# Altium PCB Radar.PcbDoc (part 3 of 3)
Units mil, origin at the board's own origin, x right, y up, seen from the top; angles counter-clockwise.
Board outline 2145 x 1580 mil, 4 copper layers (Layer 1, Layer 2, Layer 3, Layer 4), stack 61.58 mil thick; 62 components, 38 nets, 226 pads, 53 vias.
Unrouted connection lines stored in the file: 17.
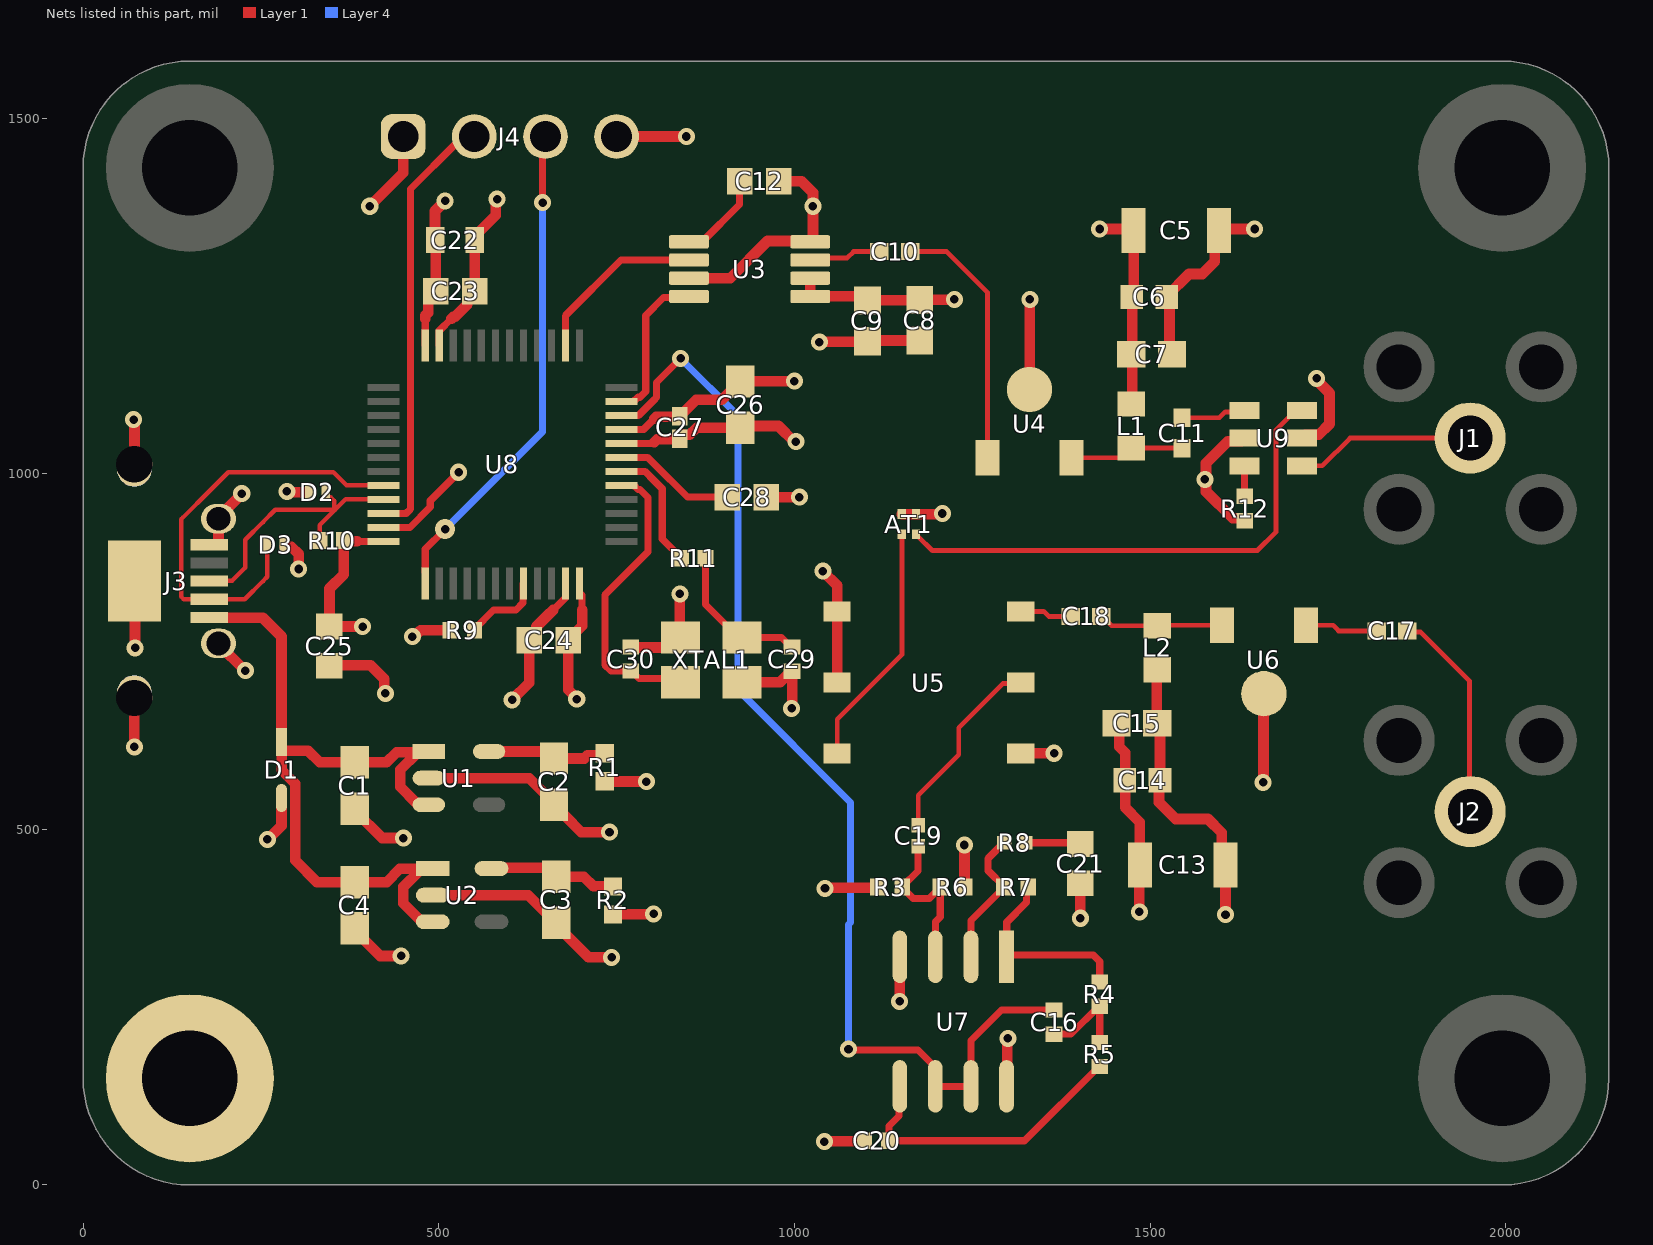
[diagram p4: the nets of this part, all layers, seen from the top]

## Part data (continued)
R3 R6: library part CRGCQ0402F33K, "Fixed Resistor, Metal Glaze/thick Film, 0.0625W, 33000ohm, 50V, 1% +/-Tol, 100ppm/Cel, Surface Mount, 0402", Manufacturer="TE Connectivity", Resistor Type="FIXED RESISTOR", Supplier Part Number=A129645CT-ND, Category="Chip SMD Resistors", ComponentLink1Description=https://datasheet.ciiva.com:443/pdfs/VipMasterIC/IC/TYEL/TYEL-S-A0009513709/TYEL-S-A0009515791-1.pdf?src-supplier=IHS+Markit, ComponentLink1URL=https://datasheet.ciiva.com:443/pdfs/VipMasterIC/IC/TYEL/TYEL-S-A0009513709/TYEL-S-A0009515791-1.pdf?src-supplier=IHS+Markit, ComponentLink2Description=https://www.te.com/commerce/DocumentDelivery/DDEController?Action=srchrtrv&amp;DocNm=1773204-3&amp;DocType=DS&amp;DocLang=English&src-supplier=Digikey, ComponentLink2URL=https://www.te.com/commerce/DocumentDelivery/DDEController?Action=srchrtrv&amp;DocNm=1773204-3&amp;DocType=DS&amp;DocLang=English&src-supplier=Digikey, ComponentLink3Description=https://datasheet.octopart.com/CRGCQ0402F33K-TE-Connectivity-datasheet-114679081.pdf?src-supplier=Master+Electronics, ComponentLink3URL=https://datasheet.octopart.com/CRGCQ0402F33K-TE-Connectivity-datasheet-114679081.pdf?src-supplier=Master+Electronics, Manufacturer Part Number=CRGCQ0402F33K, Pins=2, Pricing="1=0.1, 10=0.025, 100=0.0121, 1000=0.00663, 2500=0.00542, 5000=0.00473 (USD)", Reach SVHC Compliant=Yes, RoHS=Yes, RoHS Compliant=Yes, Stock=860508, Supplier=Digikey
R4 R5 R9: library part AC0402FR-0710KL, "Fixed Resistor, Metal Glaze/thick Film, 0.0625W, 10000ohm, 50V, 1% +/-Tol, 100ppm/Cel, Surface Mount, 0402", Case/Package=0402, Manufacturer=Yageo, Max Operating Temperature=155°C, Min Operating Temperature=-55°C, Package Height=0.32mm, Package Length=1mm, Package Shape=Rectangular, Package Width=0.5mm, Power=62.5mW, Rated Temperature=70°C, Resistor Type="FIXED RESISTOR", Supplier Part Number=YAG3436CT-ND, Temperature Coefficient (ppm/Cel)=100, Tolerance=1%, Working Voltage=50V, Additional Feature="LASER TRIMMABLE", Category="Chip SMD Resistors", ComponentLink1Description=https://datasheet.ciiva.com:443/pdfs/VipMasterIC/IC/YAGO/YAGO-S-A0003597364/YAGO-S-A0003597364-1.pdf?src-supplier=IHS+Markit, ComponentLink1URL=https://datasheet.ciiva.com:443/pdfs/VipMasterIC/IC/YAGO/YAGO-S-A0003597364/YAGO-S-A0003597364-1.pdf?src-supplier=IHS+Markit, ComponentLink2Description=https://datasheet.ciiva.com/12656/pyu-ac-51-rohs-l-2-12656634.pdf?src-supplier=Mouser, ComponentLink2URL=https://datasheet.ciiva.com/12656/pyu-ac-51-rohs-l-2-12656634.pdf?src-supplier=Mouser, Construction=Chip, JESD-609 Code=e3, Manufacturer Part Number=AC0402FR-0710KL, Mounting Technology="Surface Mount", Packaging="Tape and Reel", Pins=2, Pricing="1=0.1, 10=0.009, 100=0.0082, 1000=0.00612, 2500=0.0051, 5000=0.00407 (USD)", Reach SVHC Compliant=Yes, Reference Standard=AEC-Q200, RoHS=Yes, RoHS Compliant=Yes, Stock=889565, Supplier=Digikey, Technology="METAL GLAZE/THICK FILM", Terminal Finish=Nickel, Termination=Wraparound
R7: library part RC0402FR-07300KL, "Fixed Resistor, Metal Glaze/thick Film, 0.0625W, 300000ohm, 50V, 1% +/-Tol, 100ppm/Cel, Surface Mount, 0402", Case/Package=0402, Manufacturer=Yageo, Max Operating Temperature=155°C, Min Operating Temperature=-55°C, Package Height=0.35mm, Package Length=1mm, Package Shape=Rectangular, Package Width=0.5mm, Power=62.5mW, Rated Temperature=70°C, Resistor Type="FIXED RESISTOR", Supplier Part Number=311-300KLRCT-ND, Temperature Coefficient (ppm/Cel)=100, Tolerance=1%, Working Voltage=50V, Additional Feature="LASER TRIMMABLE", Category="Chip SMD Resistors", ComponentLink1Description=https://datasheet.ciiva.com:443/pdfs/VipMasterIC/IC/YAGO/YAGO-S-A0008145938/YAGO-S-A0008145938-1.pdf?src-supplier=IHS+Markit, ComponentLink1URL=https://datasheet.ciiva.com:443/pdfs/VipMasterIC/IC/YAGO/YAGO-S-A0008145938/YAGO-S-A0008145938-1.pdf?src-supplier=IHS+Markit, ComponentLink2Description=https://datasheet.ciiva.com/16771/pyu-rc0402-51-rohs-l-6-r-16771583.pdf?src-supplier=Future+Electronics, ComponentLink2URL=https://datasheet.ciiva.com/16771/pyu-rc0402-51-rohs-l-6-r-16771583.pdf?src-supplier=Future+Electronics, Construction=Chip, JESD-609 Code=e3, Manufacturer Part Number=RC0402FR-07300KL, Mounting Technology="Surface Mount", Packaging="Tape and Reel", Pins=2, Pricing="1=0.1, 10=0.007, 100=0.0061, 1000=0.00408, 2500=0.00357 (USD)", Reach SVHC Compliant=Yes, RoHS=Yes, RoHS Compliant=Yes, Stock=802480, Supplier=Digikey, Technology="METAL GLAZE/THICK FILM", Terminal Finish=Nickel, Termination=Wraparound
R8: library part RC0402FR-071KL, "Fixed Resistor, Metal Glaze/thick Film, 0.0625W, 1000ohm, 50V, 1% +/-Tol, 100ppm/Cel, Surface Mount, 0402", Case/Package=0402, Manufacturer=Yageo, Max Operating Temperature=155°C, Min Operating Temperature=-55°C, Package Height=0.35mm, Package Length=1mm, Package Shape=Rectangular, Package Width=0.5mm, Power=62.5mW, Rated Temperature=70°C, Resistor Type="FIXED RESISTOR", Supplier Part Number=311-1.00KLRTR-ND, Temperature Coefficient (ppm/Cel)=100, Tolerance=1%, Working Voltage=50V, Additional Feature="LASER TRIMMABLE", Category="Chip SMD Resistors", ComponentLink1Description=https://datasheet.ciiva.com:443/pdfs/VipMasterIC/IC/YAGO/YAGO-S-A0008145938/YAGO-S-A0008145938-1.pdf?src-supplier=IHS+Markit, ComponentLink1URL=https://datasheet.ciiva.com:443/pdfs/VipMasterIC/IC/YAGO/YAGO-S-A0008145938/YAGO-S-A0008145938-1.pdf?src-supplier=IHS+Markit, ComponentLink2Description=https://datasheet.ciiva.com/11819/0900766b80c66297-11819477.pdf?src-supplier=Rs, ComponentLink2URL=https://datasheet.ciiva.com/11819/0900766b80c66297-11819477.pdf?src-supplier=Rs, ComponentLink3Description=https://datasheet.ciiva.com/7849/1018594-7849869.pdf?src-supplier=Element14, ComponentLink3URL=https://datasheet.ciiva.com/7849/1018594-7849869.pdf?src-supplier=Element14, ComponentLink4Description=https://datasheet.ciiva.com/7849/1018594-7849871.pdf?src-supplier=Element14, ComponentLink4URL=https://datasheet.ciiva.com/7849/1018594-7849871.pdf?src-supplier=Element14, ComponentLink5Description=https://datasheet.ciiva.com/7983/1018594-7983502.pdf?src-supplier=Element14, ComponentLink5URL=https://datasheet.ciiva.com/7983/1018594-7983502.pdf?src-supplier=Element14, ComponentLink6Description=https://datasheet.ciiva.com/22747/1018594-22747513.pdf?src-supplier=Element14, ComponentLink6URL=https://datasheet.ciiva.com/22747/1018594-22747513.pdf?src-supplier=Element14, ComponentLink7Description=https://datasheet.ciiva.com/17063/pyu-rc0402-51-rohs-l-6-r-17063193.pdf?src-supplier=Future+Electronics, ComponentLink7URL=https://datasheet.ciiva.com/17063/pyu-rc0402-51-rohs-l-6-r-17063193.pdf?src-supplier=Future+Electronics, ComponentLink8Description=https://datasheet.ciiva.com/12666/pyu-rc0402-51-rohs-l-6-r-12666741.pdf?src-supplier=Mouser, ComponentLink8URL=https://datasheet.ciiva.com/12666/pyu-rc0402-51-rohs-l-6-r-12666741.pdf?src-supplier=Mouser, Construction=Chip, JESD-609 Code=e3, Manufacturer Part Number=RC0402FR-071KL, Mounting Technology="Surface Mount", Packaging="Tape and Reel", Pins=2, Pricing="10000=0.00204, 20000=0.002, 30000=0.00181, 50000=0.0017, 70000=0.00161 (USD)", Reach SVHC Compliant=Yes, RoHS=Yes, RoHS Compliant=Yes, Stock=1112186, Supplier=Digikey, Technology="METAL GLAZE/THICK FILM", Terminal Finish=Nickel, Termination=Wraparound
R10: library part RC0402FR-071K5L, "Fixed Resistor, Metal Glaze/thick Film, 0.0625W, 1500ohm, 50V, 1% +/-Tol, 100ppm/Cel, Surface Mount, 0402", Case/Package=0402, Manufacturer=Yageo, Max Operating Temperature=155°C, Min Operating Temperature=-55°C, Package Height=0.35mm, Package Length=1mm, Package Shape=Rectangular, Package Width=0.5mm, Power=62.5mW, Rated Temperature=70°C, Resistor Type="FIXED RESISTOR", Supplier Part Number=311-1.50KLRCT-ND, Temperature Coefficient (ppm/Cel)=100, Tolerance=1%, Working Voltage=50V, Additional Feature="LASER TRIMMABLE", Category="Chip SMD Resistors", ComponentLink1Description=https://datasheet.ciiva.com:443/pdfs/VipMasterIC/IC/YAGO/YAGO-S-A0008145938/YAGO-S-A0008145938-1.pdf?src-supplier=IHS+Markit, ComponentLink1URL=https://datasheet.ciiva.com:443/pdfs/VipMasterIC/IC/YAGO/YAGO-S-A0008145938/YAGO-S-A0008145938-1.pdf?src-supplier=IHS+Markit, ComponentLink2Description=https://datasheet.ciiva.com/11808/0900766b80c66297-11808238.pdf?src-supplier=Rs, ComponentLink2URL=https://datasheet.ciiva.com/11808/0900766b80c66297-11808238.pdf?src-supplier=Rs, ComponentLink3Description=https://datasheet.ciiva.com/7849/1018594-7849863.pdf?src-supplier=Element14, ComponentLink3URL=https://datasheet.ciiva.com/7849/1018594-7849863.pdf?src-supplier=Element14, ComponentLink4Description=https://datasheet.ciiva.com/7849/1018594-7849864.pdf?src-supplier=Element14, ComponentLink4URL=https://datasheet.ciiva.com/7849/1018594-7849864.pdf?src-supplier=Element14, ComponentLink5Description=https://datasheet.ciiva.com/2453/pyu-r-int-thick-7-2453439.pdf?src-supplier=Digikey, ComponentLink5URL=https://datasheet.ciiva.com/2453/pyu-r-int-thick-7-2453439.pdf?src-supplier=Digikey, ComponentLink6Description=https://datasheet.ciiva.com/2453/pyu-r-int-thick-7-2453440.pdf?src-supplier=Digikey, ComponentLink6URL=https://datasheet.ciiva.com/2453/pyu-r-int-thick-7-2453440.pdf?src-supplier=Digikey, ComponentLink7Description=https://datasheet.ciiva.com/2453/pyu-r-int-thick-7-2453441.pdf?src-supplier=Digikey, ComponentLink7URL=https://datasheet.ciiva.com/2453/pyu-r-int-thick-7-2453441.pdf?src-supplier=Digikey, ComponentLink8Description=https://datasheet.ciiva.com/12558/pyu-rc0402-51-rohs-l-6-r-8721-12558542.pdf?src-supplier=Mouser, ComponentLink8URL=https://datasheet.ciiva.com/12558/pyu-rc0402-51-rohs-l-6-r-8721-12558542.pdf?src-supplier=Mouser, ComponentLink9Description=https://datasheet.ciiva.com/46394/1018594-46394950.pdf?src-supplier=Element14, ComponentLink9URL=https://datasheet.ciiva.com/46394/1018594-46394950.pdf?src-supplier=Element14, ComponentLink10Description=https://datasheet.ciiva.com/15189/getdatasheetpartid-323992-15189370.pdf?src-supplier=Verical, ComponentLink10URL=https://datasheet.ciiva.com/15189/getdatasheetpartid-323992-15189370.pdf?src-supplier=Verical, Construction=Chip, JESD-609 Code=e3, Manufacturer Part Number=RC0402FR-071K5L, Mounting Technology="Surface Mount", Packaging="Tape and Reel", Pins=2, Pricing="1=0.1, 10=0.013, 100=0.0061, 1000=0.0051, 2500=0.00306, 10000=0.00306, 20000=0.00204, 30000=0.0017, 50000=0.00161 (USD)", Reach SVHC Compliant=Yes, RoHS=Yes, RoHS Compliant=Yes, Stock=344101, Supplier=Digikey, Technology="METAL GLAZE/THICK FILM", Terminal Finish=Nickel, Termination=Wraparound
R11: library part RC0402JR-07390RL, "Fixed Resistor, Metal Glaze/thick Film, 0.0625W, 390ohm, 50V, 5% +/-Tol, 100ppm/Cel, Surface Mount, 0402", Case/Package=0402, Manufacturer=Yageo, Max Operating Temperature=155°C, Min Operating Temperature=-55°C, Package Height=0.35mm, Package Length=1mm, Package Shape=Rectangular, Package Width=0.5mm, Power=62.5mW, Rated Temperature=70°C, Resistor Type="FIXED RESISTOR", Supplier Part Number=311-390JRCT-ND, Temperature Coefficient (ppm/Cel)=100, Tolerance=5%, Working Voltage=50V, Additional Feature="LASER TRIMMABLE", Category="Chip SMD Resistors", ComponentLink1Description=https://datasheet.ciiva.com:443/pdfs/VipMasterIC/IC/YAGO/YAGO-S-A0008145938/YAGO-S-A0008145938-1.pdf?src-supplier=IHS+Markit, ComponentLink1URL=https://datasheet.ciiva.com:443/pdfs/VipMasterIC/IC/YAGO/YAGO-S-A0008145938/YAGO-S-A0008145938-1.pdf?src-supplier=IHS+Markit, ComponentLink2Description=https://datasheet.ciiva.com/7983/1018594-7983580.pdf?src-supplier=Element14, ComponentLink2URL=https://datasheet.ciiva.com/7983/1018594-7983580.pdf?src-supplier=Element14, ComponentLink3Description=https://datasheet.ciiva.com/7850/1018594-7850204.pdf?src-supplier=Element14, ComponentLink3URL=https://datasheet.ciiva.com/7850/1018594-7850204.pdf?src-supplier=Element14, ComponentLink4Description=https://datasheet.ciiva.com/7850/1018594-7850205.pdf?src-supplier=Element14, ComponentLink4URL=https://datasheet.ciiva.com/7850/1018594-7850205.pdf?src-supplier=Element14, ComponentLink5Description=https://datasheet.ciiva.com/12656/pyu-rc0402-51-rohs-l-6-r-12656651.pdf?src-supplier=Mouser, ComponentLink5URL=https://datasheet.ciiva.com/12656/pyu-rc0402-51-rohs-l-6-r-12656651.pdf?src-supplier=Mouser, ComponentLink6Description=https://datasheet.ciiva.com/2452/pyu-r-int-thick-7-2452668.pdf?src-supplier=Digikey, ComponentLink6URL=https://datasheet.ciiva.com/2452/pyu-r-int-thick-7-2452668.pdf?src-supplier=Digikey, ComponentLink7Description=https://datasheet.ciiva.com/2452/pyu-r-int-thick-7-2452669.pdf?src-supplier=Digikey, ComponentLink7URL=https://datasheet.ciiva.com/2452/pyu-r-int-thick-7-2452669.pdf?src-supplier=Digikey, ComponentLink8Description=https://datasheet.ciiva.com/2452/pyu-r-int-thick-7-2452670.pdf?src-supplier=Digikey, ComponentLink8URL=https://datasheet.ciiva.com/2452/pyu-r-int-thick-7-2452670.pdf?src-supplier=Digikey, Construction=Chip, JESD-609 Code=e3, Manufacturer Part Number=RC0402JR-07390RL, Mounting Technology="Surface Mount", Packaging="Tape and Reel", Pins=2, Pricing="1=0.1, 10=0.007, 50=0.0066, 100=0.0061, 500=0.0051, 1000=0.00408, 5000=0.00284 (USD)", Reach SVHC Compliant=Yes, RoHS=Yes, RoHS Compliant=Yes, Stock=313047, Supplier=Digikey, Technology="METAL GLAZE/THICK FILM", Terminal Finish=Nickel, Termination=Wraparound
R12: library part RT0402BRE0750RL, "Fixed Resistor, Thin Film, 0.0625W, 50ohm, 50V, 0.1% +/-Tol, 50ppm/Cel, Surface Mount, 0402", Case/Package=0402, Manufacturer=Yageo, Max Operating Temperature=155°C, Min Operating Temperature=-55°C, Package Shape=Rectangular, Power=62.5mW, Rated Temperature=70°C, Resistor Type="FIXED RESISTOR", Supplier Part Number=13-RT0402BRE0750RLCT-ND, Tolerance=0.1%, Working Voltage=50V, Additional Feature="LASER TRIMMABLE", Category="Chip SMD Resistors", ComponentLink1Description=https://datasheet.ciiva.com:443/pdfs/VipMasterIC/IC/YAGO/YAGO-S-A0003507815/YAGO-S-A0003507815-1.pdf?src-supplier=IHS+Markit, ComponentLink1URL=https://datasheet.ciiva.com:443/pdfs/VipMasterIC/IC/YAGO/YAGO-S-A0003507815/YAGO-S-A0003507815-1.pdf?src-supplier=IHS+Markit, ComponentLink2Description=http://www.yageo.com/documents/recent/PYu-RT_1-to-0.01_RoHS_L_9.pdf?src-supplier=Digikey, ComponentLink2URL=http://www.yageo.com/documents/recent/PYu-RT_1-to-0.01_RoHS_L_9.pdf?src-supplier=Digikey, ComponentLink3Description=https://datasheet.octopart.com/RT0402BRE0750RL-Yageo-datasheet-166250672.pdf?src-supplier=Future+Electronics, ComponentLink3URL=https://datasheet.octopart.com/RT0402BRE0750RL-Yageo-datasheet-166250672.pdf?src-supplier=Future+Electronics, Manufacturer Part Number=RT0402BRE0750RL, Mounting Technology="Surface Mount", Packaging="Tape and Reel", Pins=2, Pricing="1=0.18, 10=0.133, 50=0.1072, 100=0.0959, 500=0.0765, 1000=0.06834, 5000=0.05406 (USD)", Reach SVHC Compliant=Yes, RoHS=Yes, RoHS Compliant=Yes, Stock=2520, Supplier=Digikey, Technology="THIN FILM", Temperature Coefficient (ppm/Cel)=50, Termination=Wraparound
U1: "Fixed Positive LDO Regulator, 3.3V, 0.31V Dropout, CMOS, PDSO5", Case/Package=LSSOP, Dropout Voltage1-Max=310mV, Manufacturer=Microchip, Max Supply Voltage=6V, Min Input Voltage=4.3V, Operating Temperature, TJ-Max=125°C, Operating Temperature, TJ-Min=-40°C, Output Current1-Max=150mA, Output Voltage1-Max=3.399V, Output Voltage1-Min=3.201V, Output Voltage1-Nom=3.3V, Package Body Material=Plastic, Package Shape=Rectangular, Package Style="SMALL OUTLINE, LOW PROFILE, SHRINK PITCHMeter", Supplier Part Number=MIC5317-3.3YM5-CT-ND, Category="Voltage Regulators - Linear", Channels=1, ComponentLink1Description=https://datasheet.ciiva.com:443/pdfs/VipMasterIC/IC/MCRL/MCRLS06213/MCRLS06213-1.pdf?src-supplier=IHS+Markit, ComponentLink1URL=https://datasheet.ciiva.com:443/pdfs/VipMasterIC/IC/MCRL/MCRLS06213/MCRLS06213-1.pdf?src-supplier=IHS+Markit, ComponentLink2Description=http://components.arrow.com/part/dataview/62845788S774067N1374?src-supplier=Arrow+Electronics, ComponentLink2URL=http://components.arrow.com/part/dataview/62845788S774067N1374?src-supplier=Arrow+Electronics, ComponentLink3Description=http://www.microchip.com/mymicrochip/filehandler.aspx?ddocname=en579427&src-supplier=Digikey, ComponentLink3URL=http://www.microchip.com/mymicrochip/filehandler.aspx?ddocname=en579427&src-supplier=Digikey, ComponentLink4Description=https://datasheet.octopart.com/MIC5317-3.3YM5-TR-Microchip-datasheet-26354330.pdf?src-supplier=Element14, ComponentLink4URL=https://datasheet.octopart.com/MIC5317-3.3YM5-TR-Microchip-datasheet-26354330.pdf?src-supplier=Element14, Height - Seated (Max)=1.45mm, JESD-30 Code=R-PDSO-G5, Length=2.9mm, Manufacturer Part Number=MIC5317-3.3YM5-TR, Pins=5, Pricing="1=0.22, 25=0.18, 100=0.16, 3000=0.16 (USD)", Reach SVHC Compliant=Yes, Regulator Type="FIXED POSITIVE SINGLE OUTPUT LDO REGULATOR", RoHS=No, Stock=26650, Supplier=Digikey, Surface Mount=Yes, Technology=CMOS, Terminal Form="Gull Wing", Terminal Pitch=0.95mm, Terminal Position=DUAL, Width=1.6mm
U2: "Fixed Positive LDO Regulator, 5V, 0.25V Dropout, PDSO5", Manufacturer="Texas Instruments", Supplier Part Number=296-TPS7A2450DBVRCT-ND, Category="Voltage Regulators - Linear", ComponentLink1Description=http://www.ti.com/general/docs/suppproductinfo.tsp?distId=10&amp;gotoUrl=http%3A%2F%2Fwww.ti.com%2Flit%2Fgpn%2Ftps7a24&src-supplier=Digikey, ComponentLink1URL=http://www.ti.com/general/docs/suppproductinfo.tsp?distId=10&amp;gotoUrl=http%3A%2F%2Fwww.ti.com%2Flit%2Fgpn%2Ftps7a24&src-supplier=Digikey, Manufacturer Part Number=TPS7A2450DBVR, Pricing="1=0.52, 10=0.362, 25=0.324, 100=0.2817, 250=0.26148, 500=0.24932, 1000=0.23931 (USD)", RoHS=Yes, Stock=4495, Supplier=Digikey
U3: "Voltage Controlled Oscillator, 2370MHz Min, 2470MHz Max", Control Voltage-Max=2.4V, Control Voltage-Min=400mV, Manufacturer=Maxim, Manufacturer Series=MAX2750AUA, Max Operating Temperature=125°C, Max Supply Current=21mA, Max Supply Voltage=5.5V, Min Operating Temperature=-40°C, Min Supply Voltage=2.7V, Offset Frequency=4MHz, Operating Frequency-Max=2.47GHz, Operating Frequency-Min=2.37GHz, Output Power (dBm)=-3dBm, Package Body Material=Plastic, Package Equivalence Code=TSSOP8,.19, Power Supplies=3/5V, Supplier Part Number=MAX2750AUA+-ND, Category=Oscillators, ComponentLink1Description=https://datasheet.ciiva.com:443/pdfs/VipMasterIC/IC/MAXM/MAXM-S-A0000999237/MAXM-S-A0000999237-1.pdf?src-supplier=IHS+Markit, ComponentLink1URL=https://datasheet.ciiva.com:443/pdfs/VipMasterIC/IC/MAXM/MAXM-S-A0000999237/MAXM-S-A0000999237-1.pdf?src-supplier=IHS+Markit, ComponentLink2Description=https://datasheet.ciiva.com/2796/max2750aua-2796961.pdf?src-supplier=Digikey, ComponentLink2URL=https://datasheet.ciiva.com/2796/max2750aua-2796961.pdf?src-supplier=Digikey, ComponentLink3Description=https://datasheet.ciiva.com/12071/max2750aua-73109-12071954.pdf?src-supplier=Mouser, ComponentLink3URL=https://datasheet.ciiva.com/12071/max2750aua-73109-12071954.pdf?src-supplier=Mouser, JESD-609 Code=e3, Manufacturer Part Number=MAX2750AUA+, Mounting Technology="Surface Mount", Oscillator Type="VOLTAGE CONTROLLED OSCILLATOR", Phase Noise=-125dBc/Hz, Pins=8, Pricing="1=8.28, 10=7.191, 50=6.5428, 100=6.29, 250=5.97796, 500=5.7577, 1000=5.5503 (USD)", Qualification Status="Not Qualified", Reach SVHC Compliant=Yes, RoHS=Yes, RoHS Compliant=Yes, Stock=638, Supplier=Digikey, Terminal Finish=Tin
U4 U6: "Wide Band Medium Power Amplifier, 30MHz Min, 6000MHz Max, 1 Func, BIPolar", Manufacturer="Analog Devices", Supplier Part Number=505-ADL5545ARKZ-R7CT-ND, Category="RF Amplifiers", ComponentLink1Description=https://datasheet.ciiva.com:443/pdfs/VipMasterIC/IC/ANDI/ANDIS19839/ANDIS19839-1.pdf?src-supplier=IHS+Markit, ComponentLink1URL=https://datasheet.ciiva.com:443/pdfs/VipMasterIC/IC/ANDI/ANDIS19839/ANDIS19839-1.pdf?src-supplier=IHS+Markit, ComponentLink2Description=https://datasheet.ciiva.com/18576/adl5545-18576150.pdf?src-supplier=Digikey, ComponentLink2URL=https://datasheet.ciiva.com/18576/adl5545-18576150.pdf?src-supplier=Digikey, ComponentLink3Description=https://datasheet.ciiva.com/22628/1800592-22628003.pdf?src-supplier=Element14, ComponentLink3URL=https://datasheet.ciiva.com/22628/1800592-22628003.pdf?src-supplier=Element14, ComponentLink4Description=https://datasheet.ciiva.com/18576/adl5545-18576151.pdf?src-supplier=Digikey, ComponentLink4URL=https://datasheet.ciiva.com/18576/adl5545-18576151.pdf?src-supplier=Digikey, ComponentLink5Description=https://datasheet.ciiva.com/18576/adl5545-18576152.pdf?src-supplier=Digikey, ComponentLink5URL=https://datasheet.ciiva.com/18576/adl5545-18576152.pdf?src-supplier=Digikey, Manufacturer Part Number=ADL5545ARKZ-R7, Pricing="1=4.14, 10=3.577, 25=3.3816, 100=3.1132, 250=2.95236, 500=2.83876 (USD)", Reach SVHC Compliant=Yes, RF/Microwave Device Type="WIDE BAND MEDIUM POWER", RoHS=Yes, RoHS Compliant=Yes, Stock=532, Supplier=Digikey
U5: library part ADE-30+
U7: "Operational Amplifier, 2 Func, 550uV Offset-Max, PDSO8", Average Bias Current-Max (IIB)=12uA, Case/Package=SOP, Input Offset Voltage-Max=550uV, Manufacturer="Analog Devices / Linear Technology", Max Operating Temperature=85°C, Min Operating Temperature=-40°C, Neg Supply Voltage Limit-Max=-6.3V, Neg Supply Voltage-Nom (Vsup)=-5V, Nominal Supply Voltage=5V, Package Body Material=Plastic, Package Shape=Rectangular, Package Style="SMALL OUTLINEMeter", Peak Reflow Temperature (Cel)=260°C, Supplier Part Number=505-LT6231IS8#PBF-ND, Supply Voltage Limit-Max=6.3V, Temperature Grade=INDUSTRIAL, Time @ Peak Reflow Temperature-Max (s)=30s, Amplifier Type="OPERATIONAL AMPLIFIER", Category="Amplifiers - Op Amps, Buffer, Instrumentation", Channels=2, Common-mode Reject Ratio-Nom=95dB, ComponentLink1Description=https://datasheet.ciiva.com:443/pdfs/VipMasterIC/IC/LITC/LITCS10845/LITCS10845-1.pdf?src-supplier=IHS+Markit, ComponentLink1URL=https://datasheet.ciiva.com:443/pdfs/VipMasterIC/IC/LITC/LITCS10845/LITCS10845-1.pdf?src-supplier=IHS+Markit, ComponentLink2Description=https://datasheet.ciiva.com/1802/2098-1802952.pdf?src-supplier=Digikey, ComponentLink2URL=https://datasheet.ciiva.com/1802/2098-1802952.pdf?src-supplier=Digikey, ComponentLink3Description=https://datasheet.ciiva.com/22637/1599634-22637797.pdf?src-supplier=Element14, ComponentLink3URL=https://datasheet.ciiva.com/22637/1599634-22637797.pdf?src-supplier=Element14, ComponentLink4Description=https://datasheet.ciiva.com/48705/001255199-da-01-en-ic-op-amp-dual-lt6231is8-pbf-soic-8-ltc-48705643.pdf?src-supplier=Conrad, ComponentLink4URL=https://datasheet.ciiva.com/48705/001255199-da-01-en-ic-op-amp-dual-lt6231is8-pbf-soic-8-ltc-48705643.pdf?src-supplier=Conrad, Height - Seated (Max)=1.752mm, JESD-30 Code=R-PDSO-G8, JESD-609 Code=e3, Length=4.9mm, Manufacturer Part Number=LT6231IS8#PBF, Moisture Sensitivity Level=1, Pins=8, Pricing="1=7.31, 10=4.917, 25=4.2932, 100=3.7375 (USD)", Qualification Status="Not Qualified", Reach SVHC Compliant=Yes, RoHS=Yes, RoHS Compliant=Yes, Slew Rate=260V/µs, Stock=9166, Supplier=Digikey, Surface Mount=Yes, Terminal Finish=Tin, Terminal Form="Gull Wing", Terminal Pitch=1.27mm, Terminal Position=DUAL, Unity Gain BW-Nom=215MHz, Width=3.9mm
U8: "RISC Microcontroller, 32-Bit, FLASH, CORTEX-M4F CPU, 72MHz, CMOS, PQFP48", Case/Package=LFQFP, Clock Frequency=32MHz, Manufacturer=STMicroelectronics, Max Operating Temperature=85°C, Max Supply Voltage=3.6V, Min Operating Temperature=-40°C, Min Supply Voltage=2V, Nominal Supply Voltage=3.3V, Package Body Material=Plastic, Package Equivalence Code=QFP48,.35SQ,20, Package Shape=Square, Power Supplies=2.5/3.3, Supplier Part Number=497-17421-ND, Temperature Grade=INDUSTRIAL, Category=Microcontrollers, ComponentLink1Description=https://datasheet.ciiva.com:443/pdfs/VipMasterIC/IC/SGST/SGST-S-A0001312473/SGST-S-A0001312473-1.pdf?src-supplier=IHS+Markit, ComponentLink1URL=https://datasheet.ciiva.com:443/pdfs/VipMasterIC/IC/SGST/SGST-S-A0001312473/SGST-S-A0001312473-1.pdf?src-supplier=IHS+Markit, ComponentLink2Description=https://datasheet.ciiva.com/22692/1831499-22692000.pdf?src-supplier=Element14, ComponentLink2URL=https://datasheet.ciiva.com/22692/1831499-22692000.pdf?src-supplier=Element14, ComponentLink3Description=https://datasheet.ciiva.com/29719/dm00058181-29719710.pdf?src-supplier=Digikey, ComponentLink3URL=https://datasheet.ciiva.com/29719/dm00058181-29719710.pdf?src-supplier=Digikey, ComponentLink4Description=https://datasheet.ciiva.com/24182/dm00058181-24182821.pdf?src-supplier=Future+Electronics, ComponentLink4URL=https://datasheet.ciiva.com/24182/dm00058181-24182821.pdf?src-supplier=Future+Electronics, Height - Seated (Max)=1.6mm, JESD-30 Code=S-PQFP-G48, JESD-609 Code=e3, Length=7mm, Manufacturer Part Number=STM32F303CBT6, Moisture Sensitivity Level=3, Number of I/O Lines=37, Pins=48, Pricing="1=5.55, 10=4.266, 25=3.946, 100=3.5937, 250=3.44032 (USD)", Qualification Status="Not Qualified", Reach SVHC Compliant=Yes, RoHS=Yes, RoHS Compliant=Yes, Stock=6091, Supplier=Digikey, Surface Mount=Yes, Technology=CMOS, Terminal Finish=Tin, Terminal Form="Gull Wing", Terminal Pitch=0.5mm, Terminal Position=QUAD, Width=7mm
U9: "Bi-Directional Coupler, 824MHz Min, 2525MHz Max, 1.5dB Insertion Loss-Max", Manufacturer=Mini-Circuits, Max Operating Temperature=100°C, Min Operating Temperature=-55°C, Operating Frequency-Max=2.525GHz, Operating Frequency-Min=824MHz, Supplier Part Number=3157-BDCN-10-25+CT-ND, Characteristic Impedance=50R, ComponentLink1Description=https://datasheet.ciiva.com:443/pdfs/VipMasterIC/IC/MINI/MINI-S-A0002822080/MINI-S-A0002822080-1.pdf?src-supplier=IHS+Markit, ComponentLink1URL=https://datasheet.ciiva.com:443/pdfs/VipMasterIC/IC/MINI/MINI-S-A0002822080/MINI-S-A0002822080-1.pdf?src-supplier=IHS+Markit, ComponentLink2Description=http://datasheet.octopart.com/BDCN-10-25%2B-Mini-Circuits-datasheet-8617095.pdf?src-supplier=Digikey, ComponentLink2URL=http://datasheet.octopart.com/BDCN-10-25%2B-Mini-Circuits-datasheet-8617095.pdf?src-supplier=Digikey, ComponentLink3Description=http://datasheet.octopart.com/BDCN-10-25%2B-Mini-Circuits-datasheet-8617095.pdf?src-supplier=Mouser, ComponentLink3URL=http://datasheet.octopart.com/BDCN-10-25%2B-Mini-Circuits-datasheet-8617095.pdf?src-supplier=Mouser, Construction=COMPONENT, Insertion Loss-Max=1.5dB, JESD-609 Code=e3, Manufacturer Part Number=BDCN-10-25+, Pricing="1=5.44, 20=4.932, 50=4.476, 100=4.176, 200=3.84, 500=3.55202, 1000=3.5037 (USD)", Reach SVHC Compliant=Yes, RF/Microwave Device Type="BI-DIRECTIONAL COUPLER", RoHS=Yes, RoHS Compliant=Yes, Stock=5826, Supplier=Digikey, Terminal Finish=Nickel, VSWR-Max=1.2
XTAL1: library part "TSX-3225 16.0000MF18X-AC0", "Parallel - Fundamental Quartz Crystal, 16MHz Nom", Frequency Stability=0.0018%, Frequency Tolerance=10ppm, Load Capacitance=9pF, Manufacturer=Epson, Max Operating Temperature=85°C, Min Operating Temperature=-40°C, Operating Frequency-Nom=160, Supplier Part Number=SER4070CT-ND, Additional Feature="TAPE AND REEL", Aging="1 PPM/FIRST YEAR", Category=Crystals, ComponentLink1Description=https://datasheet.ciiva.com:443/pdfs/VipMasterIC/IC/SEIK/SEIKS02827/SEIKS02827-1.pdf?src-supplier=IHS+Markit, ComponentLink1URL=https://datasheet.ciiva.com:443/pdfs/VipMasterIC/IC/SEIK/SEIKS02827/SEIKS02827-1.pdf?src-supplier=IHS+Markit, ComponentLink2Description=https://www.eea.epson.com/wp-content/uploads/2016/11/November-2016-PCS-MASTER-BOOK.pdf?src-supplier=Verical, ComponentLink2URL=https://www.eea.epson.com/wp-content/uploads/2016/11/November-2016-PCS-MASTER-BOOK.pdf?src-supplier=Verical, ComponentLink3Description=https://www5.epsondevice.com/en/information/support/pdf/june_2018_psc_masterbook.pdf?src-supplier=Digikey, ComponentLink3URL=https://www5.epsondevice.com/en/information/support/pdf/june_2018_psc_masterbook.pdf?src-supplier=Digikey, ComponentLink4Description=https://datasheet.octopart.com/TSX-3225-16.0000MF18X-AC0-Epson-datasheet-61114919.pdf?src-supplier=Future+Electronics, ComponentLink4URL=https://datasheet.octopart.com/TSX-3225-16.0000MF18X-AC0-Epson-datasheet-61114919.pdf?src-supplier=Future+Electronics, ComponentLink5Description=https://www.eea.epson.com/wp-content/uploads/2016/11/November-2016-PCS-MASTER-BOOK.pdf?src-supplier=Mouser, ComponentLink5URL=https://www.eea.epson.com/wp-content/uploads/2016/11/November-2016-PCS-MASTER-BOOK.pdf?src-supplier=Mouser, ComponentLink6Description=https://datasheet.octopart.com/TSX-3225-16.0000MF18X-AC0-Epson-datasheet-140567378.pdf?src-supplier=Arrow.cn, ComponentLink6URL=https://datasheet.octopart.com/TSX-3225-16.0000MF18X-AC0-Epson-datasheet-140567378.pdf?src-supplier=Arrow.cn, Crystal/Resonator Type="PARALLEL - FUNDAMENTAL", Drive Level=1uW, ESR=60R, JESD-609 Code=e4, Manufacturer Part Number="TSX-3225 16.0000MF18X-AC0", Mounting Technology="Surface Mount", Pricing="1=0.39, 10=0.342, 50=0.3104, 100=0.2976, 500=0.26974 (USD)", Reach SVHC Compliant=Yes, RoHS=Yes, RoHS Compliant=Yes, Stock=27034, Supplier=Digikey, Terminal Finish=Nickel

## Free pads (board coordinates)
  round 236.22 hole 133.86 mask+0: 4(150,150) 4(150,1430) 4(1995,150) 4(1995,1430)

## Via types
v1: diameter 24, hole 12, Layer 1 to Layer 4, 52 vias
v2: diameter 28, hole 12, Layer 1 to Layer 4, 1 vias

## Nets (pads, with @x,y where several pads share a name; then routed paths per layer and width w, separated by ;. In a path a pad name is that pad's centre, name@x,y a point inside that pad or via, vN(x,y) a via of type N, cw(c..) or ccw(c..) an arc to the next point about the centre after c; other vN are vias at no path point)
+3V3: C22.2 C23.2 C24.2 C25.2 C26.2 C27.2 J4.1 R1.2 R3.2 R10.1 U7.8 U8.9 U8.24 U8.36 U8.48 | length 1217.5
  Layer 1 w10: 385,904.88 U8.36@422,904.88 ; U8.24@481.06,1180.47 481.06,1218 ; U8.48@697.59,845.82 697.59,833.32 701.58,829.33 701.58,808.32 ; U8.9@756.65,1062.36 788.1,1062.36 803,1077.25
  Layer 1 w15: C25.2@346,785.19 C25.2@346.5,785.19 ; 385,904.88 367.77,904.88 R10.1@366.63,906.01 366.63,858.63 346.5,838.5 C25.2@346.5,785.19 ; v1(393,785) 392.91,785.09 346.59,785.09 C25.2@346.5,785.19 ; v1(403,1376) 450,1423 J4.1@450,1474 ; 481.06,1218 481.06,1222.27 485.08,1226.29 485.08,1245.97 C23.2@495.58,1256.47 C22.2@495.58,1327.61 ; C22.2@494.81,1328.56 494.81,1369.38 v1(509,1383.56) ; v1(694,683) 694,684.29 682,696.29 682,766.5 701.58,786.08 701.58,808.32 ; R1.2@733.48,567.85 733.98,567.35 791.65,567.35 v1(792,567) ; 803,1077.25 805.75,1080 835.67,1080 836.48,1080.81 C27.2@839,1080.81 839,1082.84 842.33,1086.17 844.23,1086.17 861.99,1103.93 898.24,1103.93 908.57,1114.26 911.58,1114.26 924.31,1127 C26.2@924.31,1130 ; C26.2@924.44,1130 v1(1000,1130) ; v1(1043,417) 1043.95,417.95 1116.46,417.95 R3.2@1117.42,418.91 ; U7.8@1298.17,138.65 1299.09,139.56 1299.09,205.09 v1(1300,206)
+5V: C5.2 C6.2 C7.2 C8.2 C9.2 C13.2 C14.2 C15.2 L1.1 L2.1 R2.2 U3.5 U3.6 | length 995.3
  Layer 1 w15: R2.2@744.84,380.47 745.11,380.74 801.74,380.74 v1(802,381) ; U3.6@1022.17,1274.81 U3.5@1022.17,1249.22 1097,1249.22 C9.2@1102.65,1243.56 1103.07,1243.98 1175.64,1243.98 1176.36,1244.7 1224.7,1244.7 v1(1225,1245) ; v1(1429,1344) 1474.85,1344 C5.2@1476.85,1342 1476.85,1250.89 C6.2@1474.34,1248.38 ; L1.1@1473.5,1097.86 1474.72,1099.07 1474.72,1166.8 C7.2@1473.42,1168.1 1475.13,1169.82 C6.2@1475.13,1247.59 ; C15.2@1510.17,649.32 1513.93,645.56 C14.2@1513.93,569.15 ; C15.2@1510.17,649.43 1509.17,650.43 1509.17,723.24 L2.1@1510.17,724.24 ; C14.2@1513.93,569.04 1512.52,567.55 1512.52,538.23 1536.13,514.62 1581.41,514.62 1600.81,495.23 1600.81,455.08 C13.2@1605.81,450.08 ; v1@1606,380.11 C13.2@1606,449.89
  other v1: 1606,380
BASEBAND_OUT: C16.2 U7.6 U7.7 U8.10 | length 1606.7
  Layer 1 w10: U8.10@756.65,1082.04 781.04,1082.04 803,1104 806,1107 806,1128 v1(840,1162) ; v1@1076,190 1173.51,190 1194.74,168.77 U7.6@1194.74,138.65 ; U7.6@1198.17,138.65 U7.7@1248.17,138.65 1248.17,203.17 1291,246 C16.2@1365,246
  Layer 4 w10: v1(840,1162) 920.5,1081.5 920.5,696.32 1078.87,537.95 1078.87,369.14 1076,366.27 v1(1076,191)
GND: AT1.A3 AT1.B3 C1.1 C2.1 C3.1 C4.1 C5.1 C6.1 C7.1 C8.1 C9.1 C12.1 C13.1 C14.1 C15.1 C20.1 C21.1 C22.1 C23.1 C24.1 C25.1 C26.1 C27.1 C28.1 C29.1 C30.1 D1.2 D2.2 D3.2 J3.5 J3.6 J3.7 J3.8 J3.9 J3.10 J4.4 pad.4@150,150 R6.1 R9.1 R12.1 U1.2 U2.2 U3.3 U3.8 U4.2 U5.1 U5.4 U5.5 U6.2 U7.4 U8.8 U8.23 U8.35 U8.47 U9.2 U9.5 XTAL1.2 XTAL1.4 | length 4712.8
  Layer 1 w10: U8.35@437,924.56 459.5,924.56 488,953.06 488,962 v1(528,1002) ; U8.23@500.74,1180.47 500.74,1200.92 517.82,1218 ; 660.86,808.32 677.91,825.37 U8.47@677.91,845.82 ; U8.8@756.65,1042.67 801.65,1042.67
  Layer 1 w15: v1(72,616) 72.06,616.06 J3.10@72.06,684.44 ; J3.9@72.13,849 73,848.13 v1(73,755) ; J3.8@72.13,1013.37 v1@72.13,1074.87 ; J3.5@177.44,900.18 189.86,900.18 190.24,900.56 J3.6@190.24,936.6 ; J3.7@190.24,760.35 v1@227.79,722.79 ; J3.6@190.24,938.6 223,971.36 v1(223,972) ; v1(259,486) 260,486 278.98,504.98 D1.2@278.98,544.08 ; D3.2@283.51,897.48 292.69,897.48 302.98,887.19 v1(303,866) ; v1(286.5,975) 287.5,974 D2.2@316.5,974 ; C25.1@346,730.19 346.41,730.59 403.97,730.59 423.28,711.29 423.28,692.72 v1(425,691) ; C4.1@381.74,360.65 381.74,357.77 417.51,322 v1(447,322) ; C1.1@382.07,529 382.07,526.13 420.47,487.72 v1(450.28,487.72) ; v1(463,771) 465.44,771 474.44,780 R9.1@516,780 ; U1.2@486.07,572 627.38,572 662.07,537.32 662.07,531.57 674.49,519.14 677.36,519.14 700.51,496 v1(740,496) ; U2.2@491.49,407.46 625.98,407.46 649.7,383.74 652.58,383.74 665,371.32 C3.1@665,368.44 ; 517.82,1218 520.46,1220.64 522.86,1220.64 540.08,1237.86 540.08,1245.97 C23.1@550.58,1256.47 ; C23.1@550.72,1256.61 550.72,1333.97 580.28,1363.52 580.28,1384.28 v1(582,1386) ; v1(603,682) 627,706 C24.1@627,766 637.5,776.5 637.5,785.14 656.36,804 656.54,804 660.86,808.32 ; C3.1@665,365.57 710.57,320 v1(743,320) ; J4.4@750,1474 v1(848,1474) ; C30.1@770.55,755.72 825.9,755.72 XTAL1.2@839.86,769.68 838.7,770.84 v1@838.7,830.7 ; 803,1044.02 807.16,1048.19 835.67,1048.19 836.67,1049.19 C27.1@839,1049.19 ; C27.1@839,1051.22 842.33,1054.55 852.6,1054.55 862.49,1064.44 C26.1@924,1064.44 ; U3.3@851.7,1274.81 909.91,1274.81 962.25,1327.15 1021.01,1327.15 U3.8@1022.17,1325.99 ; XTAL1.4@926.48,706.69 979.71,706.69 992.2,719.18 993.39,719.18 C29.1@996.52,722.31 996.76,722.07 996.76,670.76 v1(996,670) ; C26.1@926.56,1067 977.56,1067 999.56,1045 v1(1002,1045) ; C28.1@960.5,967 v1(1007,967) ; C12.1@978,1411 1010,1411 1026,1395 1026,1327.74 U3.8@1024.25,1325.99 ; v1(1035,1185) 1035.63,1185.63 1102.03,1185.63 1103.64,1187.25 1175.9,1187.25 C8.1@1176.06,1187.09 ; v1(1039.99,863) 1060.17,842.82 U5.5@1060.17,706.32 ; v1(1042,61) 1042.59,61.59 1097.94,61.59 C20.1@1098.52,62.17 ; v1(1148,258) 1148.09,258.09 1148.09,320.69 U7.4@1148.17,320.78 ; AT1.B3@1151.16,943.17 1207.17,943.17 v1(1208,944) ; v1(1239,478) 1239.14,477.86 1239.14,419.05 R6.1@1239.28,418.91 ; U5.1@1318.85,607 v1(1365,607) ; U4.2@1330.5,1118.42 1330.75,1118.67 1330.75,1244.75 v1(1331,1245) ; C21.1@1401.71,424.45 1401.85,424.31 1401.85,375.15 v1(1402,375) ; C15.1@1453.47,649.32 1456.59,646.2 1456.59,616.16 1464.87,607.87 C14.1@1464.87,569.26 ; C14.1@1464.87,568.82 1464.87,530.62 1485.51,509.98 C13.1@1485.51,450.08 ; v1(1484.98,384) C13.1@1484.98,450.08 ; C7.1@1530.72,1168.1 1527.17,1171.65 1527.17,1244.83 C6.1@1523.62,1248.38 1523.62,1249.6 1554.64,1280.61 1573.17,1280.61 1590.77,1298.22 1590.77,1335.62 1599.15,1344 v1(1647,1344) ; R12.1@1633,933.87 1629.48,937.4 1616.15,937.4 1578.72,974.82 1578.72,990.28 v1(1577,992) 1578.72,993.72 1578.72,1014.57 1609.65,1045.49 1628.49,1045.49 U9.2@1633,1050 ; v1(1659,566) 1659.46,566.46 1659.46,690.22 U6.2@1659.93,690.68 ; U9.5@1713.71,1050 1718.22,1054.51 1737.06,1054.51 1752.27,1069.72 1752.27,1113.29 1734,1131.56 v1(1734,1134)
  other v1: 228,723 839,831 71,1076 1026,1376
NetAT1_2: AT1.2 U5.6 | length 346.2
  Layer 1 w6.68: U5.6@1060.17,606.32 1060.17,654.43 1151.16,745.42 AT1.2@1151.16,914.83
NetC2_2: C2.2 R1.1 U1.5 | length 169.8
  Layer 1 w15: U1.5@570.73,609.4 652.22,609.4 C2.2@662.07,599.56 704.61,599.56 709.02,603.97 730.23,603.97 R1.1@733.33,607.07
NetC3_2: C3.2 R2.1 U2.5 | length 180.4
  Layer 1 w15: U2.5@575.17,445.82 652.73,445.82 C3.2@665,433.56 703.73,433.56 717.44,419.85 739.55,419.85 R2.1@744.84,419.84
NetC10_1: C10.1 U3.7 | length 102.3
  Layer 1 w6.68: U3.7@1022.17,1300.4 1025.15,1303.38 1074.38,1303.38 1083.19,1312.19 C10.1@1119.54,1312.19
NetC10_2: C10.2 U4.1 | length 365
  Layer 1 w6.68: C10.2@1162.54,1312.19 1213.81,1312.19 1271.45,1254.55 U4.1@1271.45,1022.28
NetC11_1: C11.1 L1.2 U4.3 | length 161.4
  Layer 1 w6.68: U4.3@1389.56,1022.28 1459.74,1022.28 L1.2@1473.5,1036.04 1544.46,1036.04 C11.1@1545,1035.5
NetC11_2: C11.2 U9.1 | length 92.3
  Layer 1 w6.68: C11.2@1545,1078.5 1597.5,1078.5 1605.79,1086.79 1630.82,1086.79 U9.1@1633,1088.98
NetC12_2: C12.2 U3.1 | length 125.5
  Layer 1 w10: U3.1@851.7,1325.99 870.4,1325.99 923,1378.59 C12.2@923,1411
NetC16_1: C16.1 R4.2 R5.1 | length 131.3
  Layer 1 w10: C16.1@1365,211.98 1365.3,212.29 1388.96,212.29 1427.99,251.32 R4.2@1429.17,251.32 R5.1@1429.17,200.53
NetC17_1: C17.1 J2.1 | length 300.5
  Layer 1 w6.68: C17.1@1861.5,779 1863.14,777.36 1880.64,777.36 1949,709 J2.1@1949,525
NetC17_2: C17.2 U6.1 | length 102.8
  Layer 1 w6.68: U6.1@1718.98,786.82 1757.18,786.82 1765,779 C17.2@1818.5,779
NetC18_1: C18.1 L2.2 U6.3 | length 175
  Layer 1 w6.68: C18.1@1431.67,799.32 1432.67,799.32 1445.86,786.13 L2.2@1510.17,786.13 1510.86,786.82 U6.3@1600.87,786.82
NetC18_2: C18.2 U5.3 | length 73.4
  Layer 1 w6.68: U5.3@1318.17,806.32 1350.68,806.32 1357.68,799.32 C18.2@1388.67,799.32
NetC19_1: C19.1 U5.2 | length 274.1
  Layer 1 w6.68: C19.1@1174,505.9 1174,548 1231,605 1231,642.95 1293.03,704.98 1316.83,704.98 U5.2@1318.17,706.32
NetC19_2: C19.2 R3.1 R6.2 U7.3 | length 233.5
  Layer 1 w10: R3.1@1151.67,418.12 1166.79,403 1189.91,403 1205.03,418.12 R6.2@1205.03,418.91 1205.03,376.97 1198.17,370.11 U7.3@1198.17,320.78 ; R3.1@1151.67,418.91 1151.67,419.69 1173.61,441.63 C19.2@1173.61,475.7
NetC20_2: C20.2 R5.2 U7.5 | length 422.2
  Layer 1 w10: C20.2@1132.54,62.17 1323.64,62.17 1427.99,166.52 R5.2@1429.17,166.52 ; C20.2@1132.54,62.75 1133.12,63.34 1133.12,83.12 1147.2,97.2 1147.2,137.68 U7.5@1148.17,138.65
NetC21_2: C21.2 R8.2 | length 77.5
  Layer 1 w10: R8.2@1324.86,481.07 1400.09,481.07 C21.2@1401.71,479.45
NetC28_2: C28.2 U8.7 | length 157
  Layer 1 w10: U8.7@771.65,1022.99 793.66,1022.99 803,1013.64 849.64,967 C28.2@905.5,967
NetC29_2: C29.2 R11.2 XTAL1.1 | length 209.8
  Layer 1 w10: R11.2@875,881 875,816.24 921.55,769.68 XTAL1.1@926.48,769.68 ; XTAL1.1@927.11,769.68 981.98,769.68 995.33,756.33 C29.2@995.89,756.33
NetC30_2: C30.2 U8.5 XTAL1.3 | length 421.7
  Layer 1 w10: U8.5@756.65,983.62 774.15,983.62 779.89,977.87 782.85,977.87 794.15,966.57 794.15,890.19 733.42,829.47 733.42,808.32 733.42,731.22 742.21,722.43 771,722.43 781.49,711.95 834.6,711.95 XTAL1.3@839.86,706.69
NetJ1_1: J1.1 U9.4 | length 252.4
  Layer 1 w6.68: U9.4@1713.71,1011.02 1742.1,1011.02 1781.08,1050 J1.1@1950,1050
NetR4_1: R4.1 R7.2 U7.1 | length 274.4
  Layer 1 w10: U7.1@1298.17,320.78 1298.49,321.09 1298.49,369.49 1326.01,397.01 1326.01,416.15 R7.2@1328.77,418.91 ; U7.1@1298.17,323.1 1420.38,323.1 1429.17,314.31 R4.1@1429.17,285.34
NetR7_1: R7.1 R8.1 U7.2 | length 197.8
  Layer 1 w10: U7.2@1248.17,320.78 1248.17,371.78 1294.51,418.12 R7.1@1294.51,418.91 ; R7.1@1294.51,419.69 1272.37,441.84 1272.37,459.24 1294.21,481.07 R8.1@1295.06,481.07
NetR9_2: R9.2 U8.44 | length 112.5
  Layer 1 w10: R9.2@550.02,780 550.02,781.18 577.15,808.32 608.43,808.32 618.54,818.42 U8.44@618.54,845.82
NetR11_1: R11.1 U8.6 | length 176.5
  Layer 1 w10: U8.6@756.65,1003.3 777.07,1003.3 789.7,1003.3 803,990 814.15,978.85 814.15,908.39 840.75,881.79 R11.1@840.75,881
NetR12_2: R12.2 U9.3 | length 42.9
  Layer 1 w10: R12.2@1633,968.13 U9.3@1633,1011.02
SPLT_TX_OUT: AT1.1 U9.6 | length 718.4
  Layer 1 w6.68: AT1.1@1170.84,914.83 1170.84,913.84 1173.41,911.28 1174.39,911.28 1193.67,892 1651,892 1677,918 1677,1061.32 1704.65,1088.98 U9.6@1713.71,1088.98
SWCLK: J4.3 U8.37 | length 681.7
  Layer 1 w10: U8.37@481.06,860.82 481.06,894.06 v2@508,921 ; v1(646,1381) 646,1470 J4.3@650,1474
  Layer 4 w10: v2(509,922) 646,1059 646,1218 v1(646,1381)
SWDIO: J4.2 U8.34 | length 596
  Layer 1 w10: U8.34@437,944.25 454.25,944.25 460.1,950.1 460.1,1218 460.1,1400.1 523.86,1463.86 539.86,1463.86 J4.2@550,1474
USB_N: D3.1 J3.2 U8.32 | length 608.8
  Layer 1 w6.23: D3.1@259.01,899.98 259.01,855.01 253,849 227.41,823.41 141.52,823.41 141,823.93 137.75,827.18 137.75,935.83 141,939.08 177.92,976 203.92,1002 351.92,1002 370.3,983.62 385,983.62 U8.32@422,983.62
USB_P: D2.1 J3.3 R10.2 U8.33 | length 395.9
  Layer 1 w6.23: J3.3@177.44,849 178.15,849.71 209.71,849.71 228,868 228,907 253,932 270.24,949.24 354.26,949.24 ; R10.2@332.38,906.01 332.38,927.36 354.26,949.24 ; D2.1@341,970 343.88,967.11 347.88,967.11 353.32,961.68 353.32,950.18 354.26,949.24 ; U8.33@422,963.93 385,963.93 368.95,963.93 354.26,949.24
VBUS: C1.2 C4.2 D1.1 J3.1 U1.1 U1.3 U2.1 U2.3 | length 1087.4
  Layer 1 w15: J3.1@177.81,797.45 252.55,797.45 253,797 278.98,771.02 D1.1@278.98,610.77 ; U2.1@473.11,441.89 450.27,419.05 450.27,395.88 473.11,373.04 473.66,373.04 476.63,370.06 U2.3@491.49,370.06 ; U1.3@486.07,534.6 472.16,534.6 469.23,537.53 468.07,537.53 445.82,559.78 445.82,583.57 468.72,606.47 470.82,606.47 472.7,608.35 U1.1@472.7,608.46 ; U1.1@486.07,609.4 473.64,609.4 U1.1@472.7,608.46 ; U2.1@491.49,444.87 475.75,444.87 475.27,444.38 445.27,444.38 426.65,425.76 328.79,425.76 298.14,456.41 298.14,564.09 279.2,583.03 279.2,610.55 316.21,610.55 332.64,594.12 426.48,594.12 440.82,608.46 U1.1@472.7,608.46
VCO_SHDN: U3.4 U8.11 | length 218.6
  Layer 1 w10: U8.11@756.65,1101.73 774.15,1101.73 779.89,1107.47 782.85,1107.47 791,1115.63 791,1218 791,1222.32 816.14,1247.46 849.95,1247.46 U3.4@851.7,1249.22
VCO_TUNE: U3.2 U8.14 | length 247.7
  Layer 1 w10: U8.14@677.91,1180.47 677.91,1218 677.91,1221.91 756.4,1300.4 U3.2@851.7,1300.4
pads on no net: J1.2 J1.3 J1.4 J1.5 J2.2 J2.3 J2.4 J2.5 J3.4 U1.4 U2.4 U8.1 U8.2 U8.3 U8.4 U8.12 U8.13 U8.15 U8.16 U8.17 U8.18 U8.19 U8.20 U8.21 U8.22 U8.25 U8.26 U8.27 U8.28 U8.29 U8.30 U8.31 U8.38 U8.39 U8.40 U8.41 U8.42 U8.43 U8.45 U8.46

## Polygon pours and split planes (outlines as drawn)
GND on Layer 2 (split plane): 2004.27,1559.65 2013.5,1558.66 2022.63,1557.01 2031.62,1554.72 2040.42,1551.79 2049,1548.24 2057.29,1544.08 2065.27,1539.35 2072.9,1534.06 2080.12,1528.23 2086.91,1521.91 2093.23,1515.12 2099.06,1507.9 2104.35,1500.27 2109.08,1492.29 2113.24,1484 2116.79,1475.42 2119.72,1466.62 2122.01,1457.63 2123.66,1448.5 2124.65,1439.27 2124.96,1430.59 2124.9,1430 2124.9,150 2124.96,149.41 2124.65,140.73 2123.66,131.5 2122.01,122.37 2119.72,113.38 2116.79,104.58 2113.24,96 2109.08,87.71 2104.35,79.73 2099.06,72.1 2093.23,64.88 2086.91,58.09 2080.12,51.77 2072.9,45.94 2065.27,40.65 2057.29,35.92 2049,31.76 2040.42,28.21 2031.62,25.28 2022.63,22.99 2013.5,21.34 2004.27,20.35 1995.59,20.04 1995,20.1 150,20.1 149.41,20.04 140.73,20.35 131.5,21.34 122.37,22.99 113.38,25.28 104.58,28.21 96,31.76 87.71,35.92 79.73,40.65 72.1,45.94 64.88,51.77 58.09,58.09 51.77,64.88 45.94,72.1 40.65,79.73 35.92,87.71 31.76,96 28.21,104.58 25.28,113.38 22.99,122.37 21.34,131.5 20.35,140.73 20.04,149.41 20.1,150 20.1,1430 20.04,1430.59 20.35,1439.27 21.34,1448.5 22.99,1457.63 25.28,1466.62 28.21,1475.42 31.76,1484 35.92,1492.29 40.65,1500.27 45.94,1507.9 51.77,1515.12 58.09,1521.91 64.88,1528.23 72.1,1534.06 79.73,1539.35 87.71,1544.08 96,1548.24 104.58,1551.79 113.38,1554.72 122.37,1557.01 131.5,1558.66 140.73,1559.65 149.41,1559.96 150,1559.9 1995,1559.9 1995.59,1559.96
+3V3 on Layer 3 (split plane): 542.4,1346.5 542.79,1344.55 543.9,1342.9 612.4,1274.39 612.4,1164.5 612.79,1162.55 613.9,1160.9 615.55,1159.79 617.5,1159.4 1040.39,1159.4 1093.4,1106.39 1093.4,467.5 1093.4,386.5 1093.79,384.55 1094.9,382.9 1113.9,363.9 1115.55,362.79 1117.5,362.4 1297.39,362.4 1329.4,330.39 1329.4,171.6 1275.6,171.6 1275.6,282.5 1275.21,284.45 1274.1,286.1 1239.1,321.1 1237.45,322.21 1235.5,322.6 972.6,322.6 972.6,347.5 972.21,349.45 971.1,351.1 782.6,539.6 780.95,540.71 779,541.1 701.11,541.1 652.6,589.61 652.6,734.5 652.21,736.45 651.1,738.1 649.45,739.21 647.5,739.6 433.6,739.6 433.6,754.5 433.21,756.45 432.1,758.1 430.45,759.21 428.5,759.6 366.6,759.6 366.6,1415.4 542.4,1415.4
+5V on Layer 3 (split plane): 2004.27,1559.65 2013.5,1558.66 2022.63,1557.01 2031.62,1554.72 2040.42,1551.79 2049,1548.24 2057.29,1544.08 2065.27,1539.35 2072.9,1534.06 2080.12,1528.23 2086.91,1521.91 2093.23,1515.12 2099.06,1507.9 2104.35,1500.27 2109.08,1492.29 2113.24,1484 2116.79,1475.42 2119.72,1466.62 2122.01,1457.63 2123.66,1448.5 2124.65,1439.27 2124.96,1430.59 2124.9,1430 2124.9,150 2124.96,149.41 2124.65,140.73 2123.66,131.5 2122.01,122.37 2119.72,113.38 2116.79,104.58 2113.24,96 2109.08,87.71 2104.35,79.73 2099.06,72.1 2093.23,64.88 2086.91,58.09 2080.12,51.77 2072.9,45.94 2065.27,40.65 2057.29,35.92 2049,31.76 2040.42,28.21 2031.62,25.28 2022.63,22.99 2013.5,21.34 2004.27,20.35 1995.59,20.04 1995,20.1 150,20.1 149.41,20.04 140.73,20.35 131.5,21.34 122.37,22.99 113.38,25.28 104.58,28.21 96,31.76 87.71,35.92 79.73,40.65 72.1,45.94 64.88,51.77 58.09,58.09 51.77,64.88 45.94,72.1 40.65,79.73 35.92,87.71 31.76,96 28.21,104.58 25.28,113.38 22.99,122.37 21.34,131.5 20.35,140.73 20.04,149.41 20.1,150 20.1,1430 20.04,1430.59 20.35,1439.27 21.34,1448.5 22.99,1457.63 25.28,1466.62 28.21,1475.42 31.76,1484 35.92,1492.29 40.65,1500.27 45.94,1507.9 51.77,1515.12 58.09,1521.91 64.88,1528.23 72.1,1534.06 79.73,1539.35 87.71,1544.08 96,1548.24 104.58,1551.79 113.38,1554.72 122.37,1557.01 131.5,1558.66 140.73,1559.65 149.41,1559.96 150,1559.9 1995,1559.9 1995.59,1559.96

## Other copper
Layer 3 (plane layer: these items are gaps in the copper):
  lines w10: 367.5,1420.5 547.5,1420.5 547.5,1346.5 617.5,1276.5 617.5,1164.5 1042.5,1164.5 1098.5,1108.5 1098.5,467.5 1098.5,386.5 1117.5,367.5 1299.5,367.5 1334.5,332.5 1334.5,166.5 1270.5,166.5 1270.5,282.5 1235.5,317.5 967.5,317.5 967.5,347.5 779,536 699,536 647.5,587.5 647.5,734.5 428.5,734.5 428.5,754.5 361.5,754.5 361.5,1420.5 522.5,1420.5

## Silkscreen, mask and mechanical layers (free items; w line width, h text height)
Top Overlay:
  text "FMCW Radar v1.1" at 1001,1463 h60
  text "(c) Sai M. / 2025" at 352,84 h60
Mechanical 1:
  lines w6: 177,-1524 ccw(c306,-1524) 306,-1653 ; 0,150 ccw(c150,150) 150,0 1995,0 ccw(c1995,150) 2145,150 2145,1430 ccw(c1995,1430) 1995,1580 150,1580 ccw(c150,1430) 0,1430 0,150